# Altium PCB PCB.PcbDoc (part 2 of 2)
Units mil, origin at the board's own origin, x right, y up, seen from the top; angles counter-clockwise.
Board outline 4133.86 x 2519.68 mil, 2 copper layers (Top Layer, Bottom Layer), stack 42.17 mil thick; 80 components, 36 nets, 189 pads, 13 vias.
Unrouted connection lines stored in the file: 60.
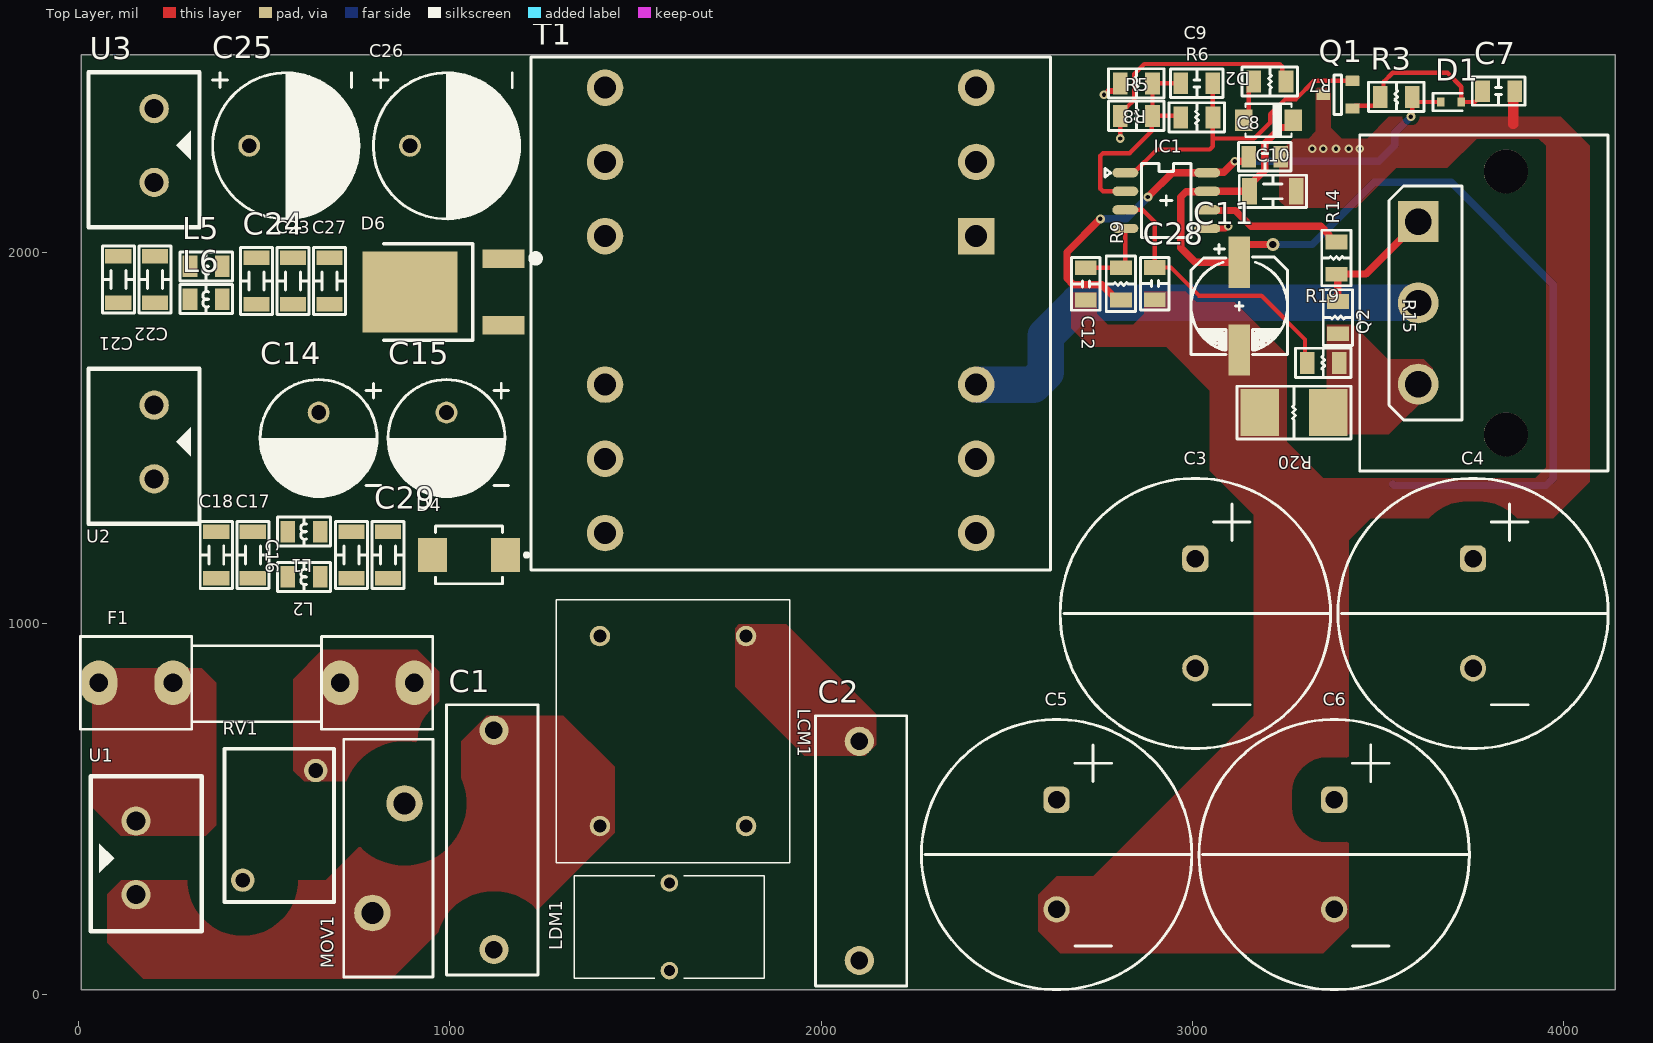
[diagram p0: Top Layer view]

## Via types
v1: diameter 23.62, hole 11.81, Top Layer to Bottom Layer, 12 vias
v2: diameter 35.43, hole 19.68, Top Layer to Bottom Layer, 1 vias

## Nets (pads, with @x,y where several pads share a name; then routed paths per layer and width w, separated by ;. In a path a pad name is that pad's centre, name@x,y a point inside that pad or via, vN(x,y) a via of type N, cw(c..) or ccw(c..) an arc to the next point about the centre after c; other vN are vias at no path point) (continued)
VAUX: (continued)
  Top Layer w11.81: v1(2806.32,2307.09) 2806.32,2377.95 2820.1,2391.73 2824.44,2391.73 2843.72,2411.01 2843.72,2480.8 2870.8,2507.87 3235.38,2507.87 3242.3,2500.96 3242.3,2470.95 R7.1
VCC: C10.1 C11.1 D2.K IC1.7 R4.2 | length 2784.6
  Top Layer w19.68: v2(3217.19,2021.65) 3146.32,2021.65 3126.64,2001.97 C11.1 3008.53,1973.78 2969.16,2013.15 2969.16,2149.61 2983.46,2163.9 3039.28,2163.9 IC1.7 C10.1 3154.2,2180.67 3180.81,2207.28 3180.88,2207.28 3195.54,2221.94 3195.54,2293.81 3238.34,2336.61 3258.53,2336.61 3272.31,2350.39 D2.K
  Bottom Layer w19.68: v2(3217.19,2021.65) 3323.49,2021.65 3490.81,2188.98 3697.5,2188.98 3973.09,1913.39 3973.09,1391.73 3953.41,1372.05 3543.96,1372.05 R4.2
VFB: C9.2 IC1.2 R5.1 R6.1 R8.2 | length 608.4
  Top Layer w11.81: IC1.2 2759.54,2164.92 2752.62,2171.84 2752.62,2260.8 2759.54,2267.72 2831.36,2267.72 2891.43,2327.78 2891.43,2366.6 R5.1 ; C9.2 R8.2 R5.1 ; R6.1 2965.38,2368.11 R5.1
VGATE: IC1.6 R14.1 | length 389.7
  Top Layer w19.68: IC1.6 3041.32,2113.9 3067.57,2113.9 3068.29,2113.19 3116.28,2113.19 3158.6,2070.87 3346.04,2070.87 3368.76,2048.14 3368.76,2038.3 3378.61,2028.46 R14.1
VIN: BR1.+ BR2.+ C3.1 C4.1 C13.1 R1.2 R4.1 R10.2 R11.2 T1.6
VOUT_5V: C14.1 C15.1 C16.1 C29.1 D4.K L1.1 R12.2 R13.2
VOUT_24V: C23.1 C24.1 C25.1 C26.1 C27.1 D6.2 L3.1 L5.1 R17.2 R18.2
VREF: C8.2 D1.K IC1.8 R3.1 R9.2 | length 1517.4
  Top Layer w11.81: v1(3589.24,2366.14) 3589.24,2369.34 3593.17,2373.27 R3.1 3606.95,2405.51 D1.K
  Top Layer w19.68: v1(2752.62,2090.55) 2662.66,2000.59 2662.66,1930.01 2679.28,1913.39 2756.6,1913.39 2797.9,1872.09 R9.2 ; v1(2880.57,2149.61) 2945.89,2214.92 IC1.8 3041.32,2215.94 3084.7,2215.94 v1(3114.55,2245.78) 3142.39,2245.78 3142.39,2248.03 C8.2
  Bottom Layer w19.68: v1(2752.62,2090.55) 2753.38,2091.3 2822.27,2091.3 v1@2879.82,2148.85 ; v1(3114.55,2245.78) 3502.34,2245.78 3545.41,2288.85 3545.41,2322.32 v1(3589.24,2366.14)
VSENSE: C28.1 IC1.3 R19.1 | length 765.8
  Top Layer w11.81: IC1.3 2866.05,2114.92 2898.88,2082.09 C28.1 2942.71,1959.52 3018.37,1883.86 3185.69,1883.86 3303.8,1765.75 3303.8,1708.66 R19.1
pads on no net: Q2.4 T1.2 T1.5 T1.8 T1.11

## Polygon pours and split planes (outlines as drawn)
AC_L1 on Top Layer "NONET_L01_P-001" (solid, pour order 0): 36.09,505.91 36.09,850.39 65.61,879.92 331.36,879.92 370.73,840.55 370.73,456.69 342.78,428.74 113.25,428.74
AC_N1 on Top Layer "NONET_L01_P-001" (solid, pour order 1): 980.97,397.64 1030.18,446.85 1030.18,683.07 1099.08,751.97 1305.77,751.97 1443.57,614.17 1443.57,437.01 1217.19,210.63 1010.5,210.63 843.17,43.31 173.88,43.31 76.24,140.94 76.24,270.47 114.83,309.05 666.01,309.06 754.59,397.64
NetF1_2 on Top Layer "NONET_L01_P-001" (solid, pour order 2): 656.17,929.13 577.43,850.39 577.43,604.33 606.95,574.8 803.8,574.8 971.13,742.13 971.13,870.08 912.07,929.13
AC_L3 on Top Layer "NONET_L01_P-001" (solid, pour order 7): 1778.21,998.03 1768.37,988.19 1768.37,830.71 1955.38,643.7 2119.03,643.7 2148.55,673.23 2148.55,755.64 1906.17,998.03
GND on Top Layer "NONET_L01_P-001" (solid, pour order 13): 3766.4,2307.09 3687.66,2228.35 3549.87,2228.35 3441.6,2120.08 3254.59,2120.08 3234.91,2139.76 3234.91,2269.68 3272.31,2307.09 3313.65,2307.09 3333.33,2326.77 3333.33,2444.88 3372.7,2444.88 3372.7,2336.61 3402.23,2307.09 3471.13,2307.09 3530.18,2366.14 3992.78,2366.14 4071.52,2287.4 4071.52,1381.89 3973.09,1283.46 3480.97,1283.46 3421.91,1224.41 3421.91,181.1 3353.02,112.2 2644.35,112.2 2585.3,171.26 2585.3,269.68 2634.51,318.9 2732.94,318.9 3166.01,751.97 3166.01,1293.31 3047.9,1411.42 3047.9,1627.95 2938.96,1736.89 2929.79,1746.06 2723.09,1746.06 2673.88,1795.28 2673.88,1893.7 2742.78,1893.7 2742.78,1834.65 2772.31,1805.12 2841.2,1805.12 2870.73,1834.65 2870.73,1893.7 3087.27,1893.7 3254.59,1726.38 3254.59,1490.16 3353.02,1391.73 3923.88,1391.73 3953.41,1421.26 3953.41,2287.4 3933.72,2307.09
NetQ2_S on Top Layer "NONET_L01_P-001" (solid, pour order 14): 3433.72,1805.12 3526.64,1712.2 3624.03,1712.2 3648.29,1687.94 3648.29,1627.95 3530.18,1509.84 3362.86,1509.84 3362.86,1805.12
AC_L3 on Bottom Layer "NONET_L01_P-001" (solid, pour order 3): 2014.43,476.38 1996.72,494.09 1996.72,638.25 2078.41,719.95 2135.04,719.95 2162.07,692.91 2162.07,525.59 2112.86,476.38
AC_L2 on Bottom Layer "NONET_L01_P-001" (solid, pour order 4): 439.63,397.64 567.58,397.64 744.75,574.8 1167.98,574.8 1650.26,92.52 1650.26,62.99 1620.73,33.46 1158.13,33.46 872.7,318.9 685.69,318.9 557.74,190.94 439.63,190.94 390.42,240.16 390.42,348.43
NetLCM1_1 on Bottom Layer "NONET_L01_P-001" (solid, pour order 5): 1374.67,978.35 1394.35,998.03 1453.41,998.03 1660.1,791.34 1660.1,289.37 1640.42,269.68 1574.32,269.68 1512.46,331.54 1512.46,624.02 1374.67,761.81 1374.67,929.13
AC_N2 on Bottom Layer "NONET_L01_P-001" (solid, pour order 6): 2078.41,353.35 2078.41,865.16 2034.12,909.45 1847.11,909.45 1768.37,830.71 1768.37,250 1965.22,53.15 2122.7,53.15 2171.91,102.36 2171.91,259.84
AC_L3 on Bottom Layer "NONET_L01_P-001" (solid, pour order 8): 1824.47,1116.14 1768.37,1060.04 1768.37,938.98 1778.21,929.13 1965.22,929.13 2093.17,1057.09 2093.17,1096.46 2073.49,1116.14
GND on Bottom Layer "NONET_L01_P-001" (solid, pour order 9): 2349.08,328.74 4091.2,328.74 4091.2,141.73 4051.83,102.36 2457.35,102.36 2349.08,210.63
NetC3_2 on Bottom Layer "NONET_L01_P-001" (solid, pour order 10): 3766.4,909.45 3786.09,889.76 3786.09,742.13 3845.14,683.07 4022.31,683.07 4022.31,437.01 2644.35,437.01 2604.98,476.38 2604.98,584.65 2929.79,909.45
VIN on Bottom Layer "NONET_L01_P-001" (solid, pour order 11): 2358.92,466.54 2358.92,663.39 2506.56,811.02 2506.56,998.03 2457.35,1047.24 2349.08,1047.24 2349.08,1253.94 2457.35,1362.2 2979,1362.2 3097.11,1244.09 3874.67,1244.09 4091.2,1027.56 4091.2,761.81 3963.25,761.81 3963.25,938.98 3835.3,1066.93 3008.53,1066.93 2496.72,555.12 2496.72,505.91 2457.35,466.54
NetC13_2 on Bottom Layer "NONET_L01_P-001" (solid, pour order 12): 2752.62,1726.38 2752.62,1588.58 2703.41,1539.37 2614.83,1539.37 2595.14,1519.68 2595.14,1431.1 2979,1431.1 2979,1667.32 2919.95,1726.38
GND on Bottom Layer "NONET_L01_P-001" (solid, pour order 15): 3500.65,2267.72 3146.32,2267.72 3136.48,2257.87 3136.48,2070.87 3106.95,2041.34 3018.37,2041.34 2959.32,2100.39 2959.32,2277.56 2841.2,2395.67 2526.24,2395.67 2506.56,2375.98 2388.45,2375.98 2368.76,2395.67 2368.76,2484.25 2388.45,2503.94 3480.97,2503.94 3500.65,2484.25
VAUX on Bottom Layer "NONET_L01_P-001" (solid, pour order 16): 2698.49,2287.4 2713.25,2272.64 2713.25,2159.45 2732.94,2139.76 2811.68,2139.76 2831.36,2159.45 2831.36,2362.2 2807.74,2385.83 2545.93,2385.83 2545.93,2326.77 2585.3,2287.4

## Text inside footprints (layer, text, board x,y; h text height)
BR1: Bottom Overlay "+" at 2409.81,1124.02 h78.74 r270; Bottom Overlay "-" at 2418.56,809.05 h78.74 r270; Bottom Overlay "~" at 1985.35,793.31 h78.74 r270; Bottom Overlay "~" at 1985.35,1124.02 h78.74 r270
BR2: Bottom Overlay "+" at 2409.81,543.31 h78.74 r270; Bottom Overlay "-" at 2418.56,228.35 h78.74 r270; Bottom Overlay "~" at 1985.35,212.6 h78.74 r270; Bottom Overlay "~" at 1985.35,543.31 h78.74 r270
D2: Mechanical 13 "*" at 3264.88,2381.3 h50 r180